# Altium PCB 400631.PcbDoc (part 4 of 8)
Units mm, origin at the board's own origin, x right, y up, seen from the top; angles counter-clockwise.
Board outline 136.53 x 63.5 mm, 4 copper layers (Top Layer, Mid-Layer 1, Mid-Layer 2, Bottom Layer), stack 1.52 mm thick; 366 components, 256 nets, 1485 pads, 1968 vias.
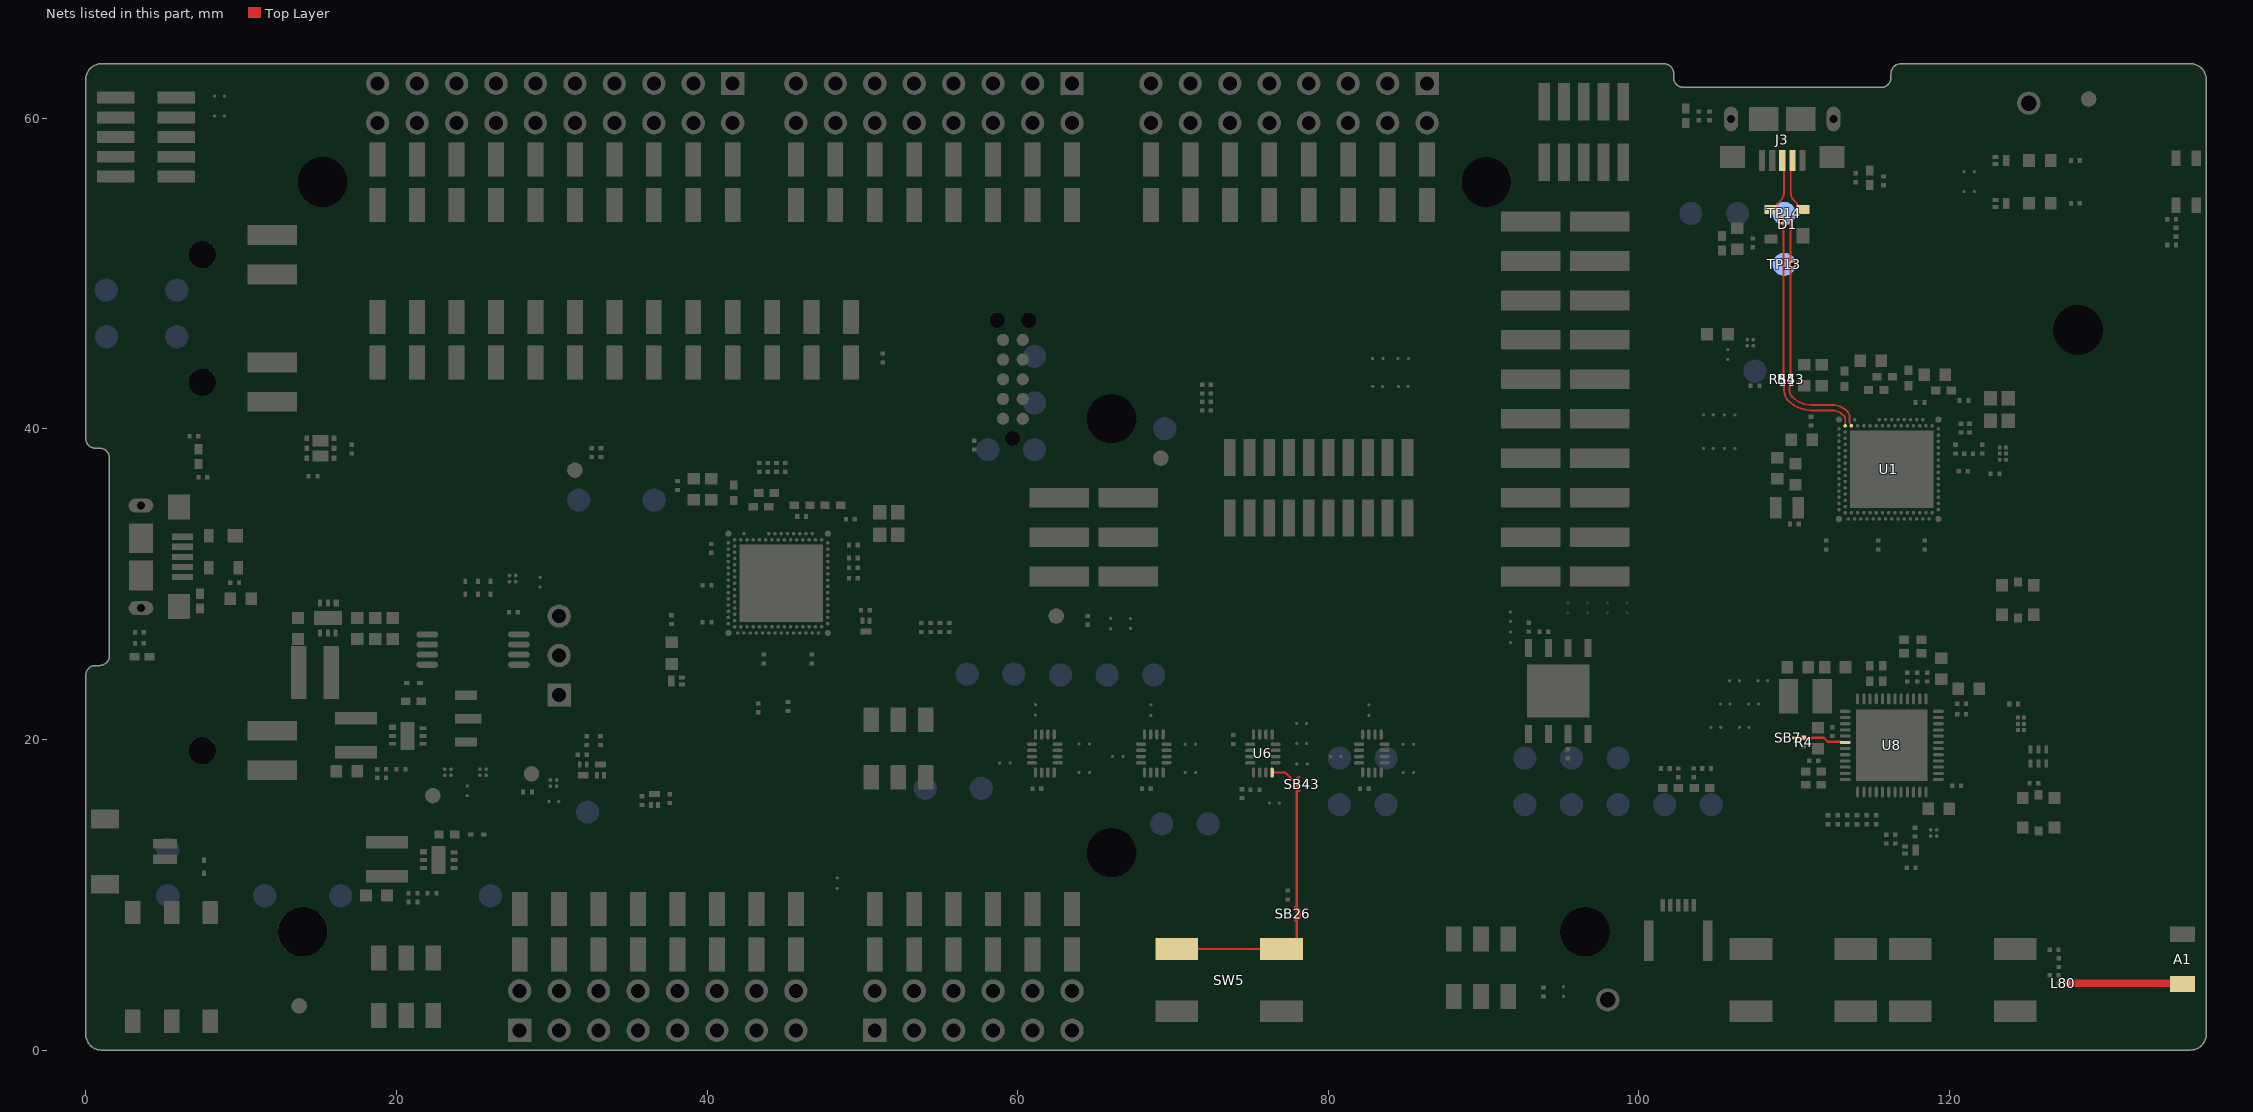
[diagram p4: the nets of this part, all layers, seen from the top]

## Part data (continued)
U12 U14 U16 U19 U20 U22: "1.0 A Load Switch IC with Slew Rate Control Driver in Ultra Small Package", Manufacturer=Toshiba, Manufacturer Part Number=TCK106AG,LF, Part number IPS=00000004390, Part number NEMS=101900575, Part number Norautron=26500627, Supplier Part Number 1=TCK106AGLFTR-ND, Artikkelnr Noca=N.A., Author=rsk, Component Class=Misc_ICs, Component Status=Active, ComponentLink1Description=Datasheet, ComponentLink1URL=https://toshiba.semicon-storage.com/info/docget.jsp?did=30131&prodName=TCK106AG, ComponentLink2Description="Supplier link", ComponentLink2URL=N.A., Footprint Doc=WLCSP-4, HelpURL=N.A., LatestRevisionDate=2019-03-01, Note=N.A., Pad Count=4, Part Number=TCK106AG, PartId=101900575, Published=2019-02-17, Supplier 1=Digi-Key, Supplier 2=Mouser, Supplier Part Number 2=757-TCK106AGLF
U13 U50: library part BGS12SN6, "Wideband SPDT RF Switch, 50MHz-6GHz. Max 30dBm, 1.8-3.5V", Manufacturer="Infineon Technologies", Manufacturer Part Number=BGS12SN6E6327XTSA1, Part number IPS=N.A., Part number NEMS=101900686, Supplier Part Number 1=726-BGS12SN6E6327XTS, Artikkelnr Noca=N.A., Author=hany, Component Class=Misc_ICs, Component Status=Active, ComponentLink1Description=Datasheet, ComponentLink1URL=https://no.mouser.com/datasheet/2/196/Infineon-BGS12SN6-DS-v02_03-EN-1226027.pdf, ComponentLink2Description="Supplier link", ComponentLink2URL=N.A., Footprint Doc=TSNP-6-8, HelpURL=https://no.mouser.com/datasheet/2/196/Infineon-BGS12SN6-DS-v02_03-EN-1226027.pdf, LatestRevisionDate=2022-02-17, Note=N.A., Pad Count=6, Part Number=BGS12SN6, Part number Norautron=N.A., PartId=101900686, Published=2022-02-17, Supplier 1=Mouser, Supplier 2=N.A., Supplier Part Number 2=N.A.
U15: library part MX25R6435FZNIL0, "Ultra low power, 64M-bit, serial multi I/O flash memory", Manufacturer=Macronix, Part number IPS=00000004370, Part number NEMS=101900438, Part number Norautron=N.A., Artikkelnr Noca=15020015, Author=rsk, Component Class=Misc_ICs, Component Status=Active, ComponentLink1Description=Datasheet, ComponentLink1URL=N.A., ComponentLink2Description="Supplier link", ComponentLink2URL=N.A., Footprint Doc=WSON-8, HelpURL=https://www.macronix.com/Lists/Datasheet/Attachments/7913/MX25R6435F,%20Wide%20Range,%2064Mb,%20v1.5.pdf, LatestRevisionDate=2021-02-26, Manufacturer Part Number=MX25R6435FZNIL0, Note=N.A., Pad Count=8, Part Number=MX25R6435FZNIL0, PartId=101900438, Published=2016-06-29, Supplier 1=Future, Supplier 2=Arrow, Supplier Part Number 1=MX25R6435FZNIL0, Supplier Part Number 2=MX25R6435FZNIL0
U26: library part LFD182G45DCJD247, "Signal Conditioning 2.4GHz and 5GHz Diplexer", Manufacturer=Murata, Part number IPS=N.A., Part number NEMS=100800026, Supplier Part Number 1=81-LFD182G45DCJD247, Artikkelnr Noca=N.A., Author=hany, Component Class=Filters, Component Status=Active, ComponentLink1Description=Datasheet, ComponentLink1URL=https://no.mouser.com/datasheet/2/281/1/LFD182G45DCJD247-2399435.pdf, ComponentLink2Description="Supplier link", ComponentLink2URL=N.A., Footprint Doc=CAF, HelpURL=N.A., LatestRevisionDate=2021-10-06, Manufacturer Part Number=LFD182G45DCJD247, Note=N.A., Pad Count=6, Part Number=LFD182G45DCJD247, Part number Norautron=N.A., PartId=100800026, Published=2021-10-06, Supplier 1=Mouser, Supplier 2=N.A., Supplier Part Number 2=N.A.
X1 X3: library part XTAL_SMD2016_32MHz_8pF_Kyocera_SA, "XTAL SMD 2016, 32MHz, Cl=8pF, ±30ppm, -40°C ~ 105°C", Manufacturer=Kyocera, Manufacturer Part Number=CX2016SA32000D0WRQG1, Part number IPS=N.A., Part number NEMS=101600100, Artikkelnr Noca=N.A., Author=hany, Component Class=Oscillators, Component Status=Active, ComponentLink1Description=Datasheet, ComponentLink1URL=N.A., ComponentLink2Description="Supplier link", ComponentLink2URL=N.A., Footprint Doc=XTAL_2016, HelpURL=N.A., LatestRevisionDate=2022-09-19, Note="XTAL SMD 32.000MHz", Pad Count=4, Part Number=XTAL_SMD2016_32MHz_8pF_Kyocera_SA, Part number Norautron=N.A., PartId=101600100, Published=2022-09-19, Supplier 1=N.A., Supplier 2=N.A., Supplier Part Number 1=N.A., Supplier Part Number 2=N.A.
X2: library part XTAL_SMD2012_32.768kHz_9pF_Golledge, "XTAL SMD 2012, 32.768kHz, 9pF, ±20ppm", Manufacturer=Golledge, Manufacturer Part Number=MP07668, Part number IPS=N.A., Part number NEMS=101600017, Part number Norautron=26470047, Artikkelnr Noca=N.A., Author=rsk, Component Class=Oscillators, Component Status=Active, ComponentLink1Description=Datasheet, ComponentLink1URL=N.A., ComponentLink2Description="Supplier link", ComponentLink2URL=N.A., Footprint Doc=XTAL_2012, HelpURL=\\hizz\pro\app9717\Datasheet\crystals\Golledge\mp07668.pdf, LatestRevisionDate=2016-11-02, Note="XTAL SMD 32.768kHz", Pad Count=2, Part Number=XTAL_SMD2012_32.768kHz_9pF_Golledge, PartId=101600017, Published=2016-11-02, Supplier 1="Link Nordic", Supplier 2=N.A., Supplier Part Number 1=N.A., Supplier Part Number 2=N.A.
X4: library part XTAL_SMD1612_40MHz_8pF_KDS, "XTAL SMD 1612, 40MHz, Cl=8pF, Total Tol: ±10ppm, -30 - 85C", Manufacturer=KDS, Manufacturer Part Number=DSX1612_40MHz, Part number IPS=N.A., Part number NEMS=101600102, Artikkelnr Noca=N.A., Author=hany, Component Class=Oscillators, Component Status=Active, ComponentLink1Description=Datasheet, ComponentLink1URL=N.A., ComponentLink2Description="Supplier link", ComponentLink2URL=N.A., Footprint Doc=XTAL_1612, HelpURL=N.A., LatestRevisionDate=2022-11-15, Note="XTAL SMD 40.000MHz 8pF", Pad Count=4, Part Number=XTAL_SMD1612_40MHz_8pF_KDS, Part number Norautron=N.A., PartId=101600102, Published=2022-11-15, Supplier 1=N.A., Supplier 2=N.A., Supplier Part Number 1=N.A., Supplier Part Number 2=N.A.

## Free pads (board coordinates)
  round 3.2 hole 3.2 unplated: 1(13.97,7.62) 1(15.24,55.88) 1(66.04,12.7) 1(66.04,40.64) 1(90.17,55.88) 1(96.52,7.62) 1(128.27,46.355)

## Via types
v1: diameter 0.5, hole 0.25, Top Layer to Bottom Layer, tented both sides, 1516 vias
v2: diameter 0.3, hole 0.1, Top Layer to Mid-Layer 1, tented top, 354 vias
v3: diameter 0.3, hole 0.1, Top Layer to Mid-Layer 1, tented both sides, 67 vias
v4: diameter 0.66, hole 0.33, Top Layer to Bottom Layer, tented both sides, 16 vias
v5: diameter 0.4, hole 0.2, Top Layer to Bottom Layer, tented both sides, 11 vias
v6: diameter 0.5, hole 0.3, Top Layer to Bottom Layer, tented both sides, 3 vias
v7: diameter 0.6, hole 0.3, Top Layer to Bottom Layer, tented both sides, 1 vias

## Nets (pads, with @x,y where several pads share a name; then routed paths per layer and width w, separated by ;. In a path a pad name is that pad's centre, name@x,y a point inside that pad or via, vN(x,y) a via of type N, cw(c..) or ccw(c..) an arc to the next point about the centre after c; other vN are vias at no path point)
ANTWIFI: A1.1 L80.1 | length 7.4
  Top Layer w0.5: L80.1@127.585,4.3 134.95,4.3 A1.1@135,4.25
BOOT/RESET: SB26.1 SB43.1 SW5.2 U6.16 | length 19.9
  Top Layer w0.152: SW5.2@70.234,6.502 SW5.2@76.984,6.502 77.774,6.502 77.97,6.698 77.97,8.788 77.97,10.795 77.97,16.766 SB43.1@77.97,17.12 ; U6.16@76.385,17.866 77.224,17.866 77.822,17.268
BUCK_EN: R4.2 SB7.2 U8.30 | length 3.4
  Top Layer w0.152: SB7.2@109.963,20.1 110.55,20.1 111.9,20.1 112.15,19.85 112.974,19.85 113.015,19.809 U8.30@113.278,19.809
D*_N: D1.2 J3.2 R53.2 TP13.1 | length 14.9
  Top Layer w0.122: v1@109.809,50.514 109.809,50.407 109.745,50.343 ; R53.2@109.812,43.473 cw(c109.812,43.54) 109.745,43.54 109.745,50.343 ; J3.2@109.879,57.268 ccw(c109.879,57.158) 109.768,57.158 109.768,55.219 ccw(c110.544,55.219) 109.995,54.671 ; 109.996,54.671 110.151,54.515 cw(c110.045,54.408) 110.195,54.408 ccw(c110.346,54.408) 110.239,54.302 110.342,54.199 ccw(c110.556,54.412) D1.2@110.556,54.11 110.32,53.875 110.193,53.875 ccw(c110.193,53.427) 109.745,53.427 109.745,50.343
  other v1: 109.88,50.578
D*_P: D1.3 J3.3 R54.2 TP14.1 | length 14.8
  Top Layer w0.122: R54.2@109.169,43.389 ccw(c109.169,43.536) 109.316,43.536 109.316,53.474 108.916,53.875 108.741,53.875 D1.3@108.506,54.11 ccw(c108.506,54.412) 108.719,54.199 108.838,54.317 ccw(c108.768,54.386) 108.866,54.386 cw(c108.964,54.386) 108.895,54.456 109.1,54.66 ccw(c108.521,55.239) 109.339,55.239 109.339,57.158 ccw(c109.229,57.158) J3.3@109.229,57.268
  other v1: 109.144,53.426
D_N: R53.1 U1.B4 | length 5.7
  Top Layer w0.122: R53.1@109.804,42.895 ccw(c110.05,42.65) 109.703,42.65 109.703,42.443 ccw(c110.254,42.443) 109.864,42.053 ccw(c111.13,43.32) 111.13,41.529 112.421,41.529 cw(c112.421,40.133) 113.408,41.12 cw(c113.034,40.746) 113.563,40.746 113.563,40.465 ccw(c113.953,40.465) U1.B4@113.678,40.189
D_P: R54.1 U1.B2 | length 5.7
  Top Layer w0.122: R54.1@109.245,42.895 cw(c109,42.65) 109.347,42.65 109.347,42.443 ccw(c110.254,42.443) 109.613,41.802 ccw(c111.13,43.319) 111.13,41.173 112.421,41.173 cw(c112.421,40.133) 113.157,40.869 cw(c112.866,40.577) 113.278,40.577 U1.B2@113.278,40.189 U1.B2@113.284,40.195